# Altium PCB PCB.pcbdoc
Units mm, origin at the board's own origin, x right, y up, seen from the top; angles counter-clockwise.
Board outline 51 x 100 mm, 4 copper layers (Top Layer, GND, POWER, Bottom Layer), stack 1.784 mm thick; 155 components, 108 nets, 814 pads, 0 vias.
Unrouted connection lines stored in the file: 225.
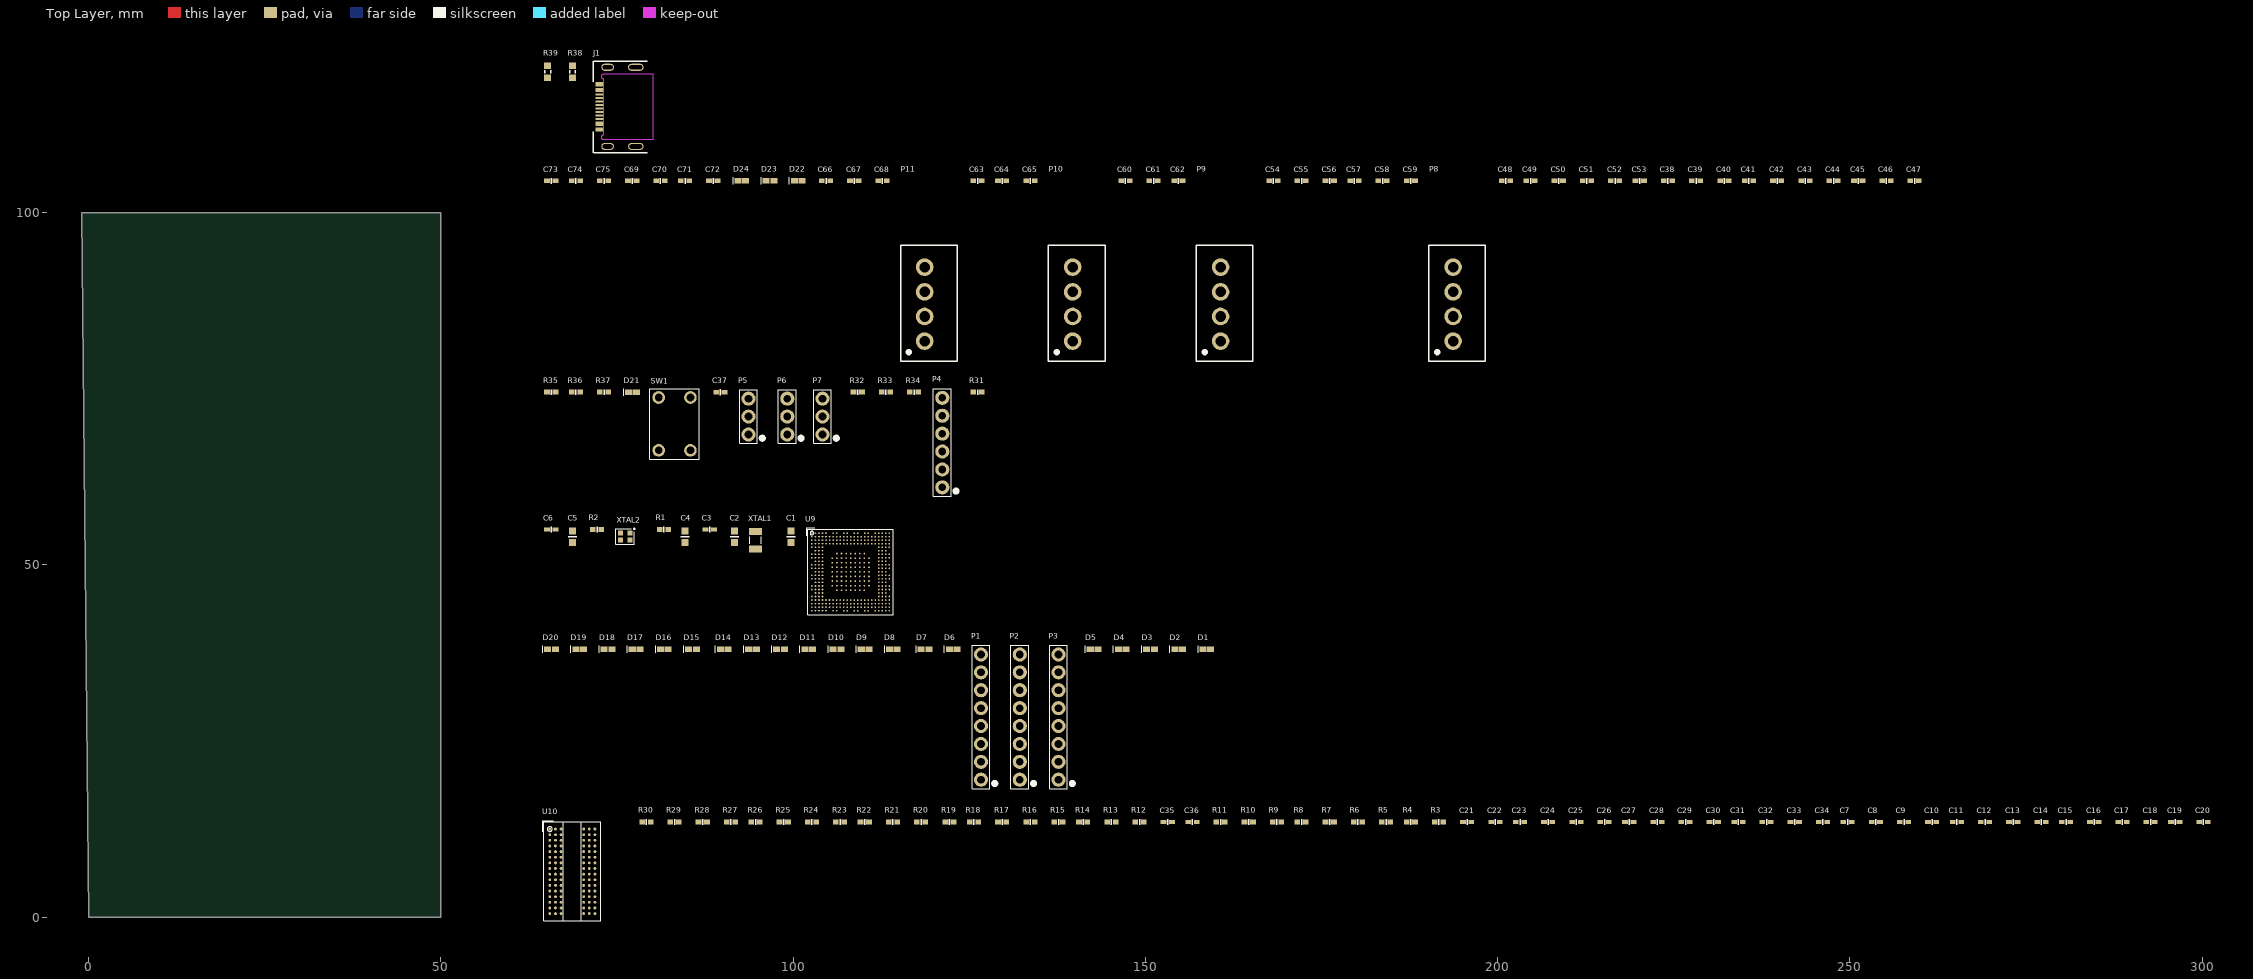
[diagram p0: Top Layer view]
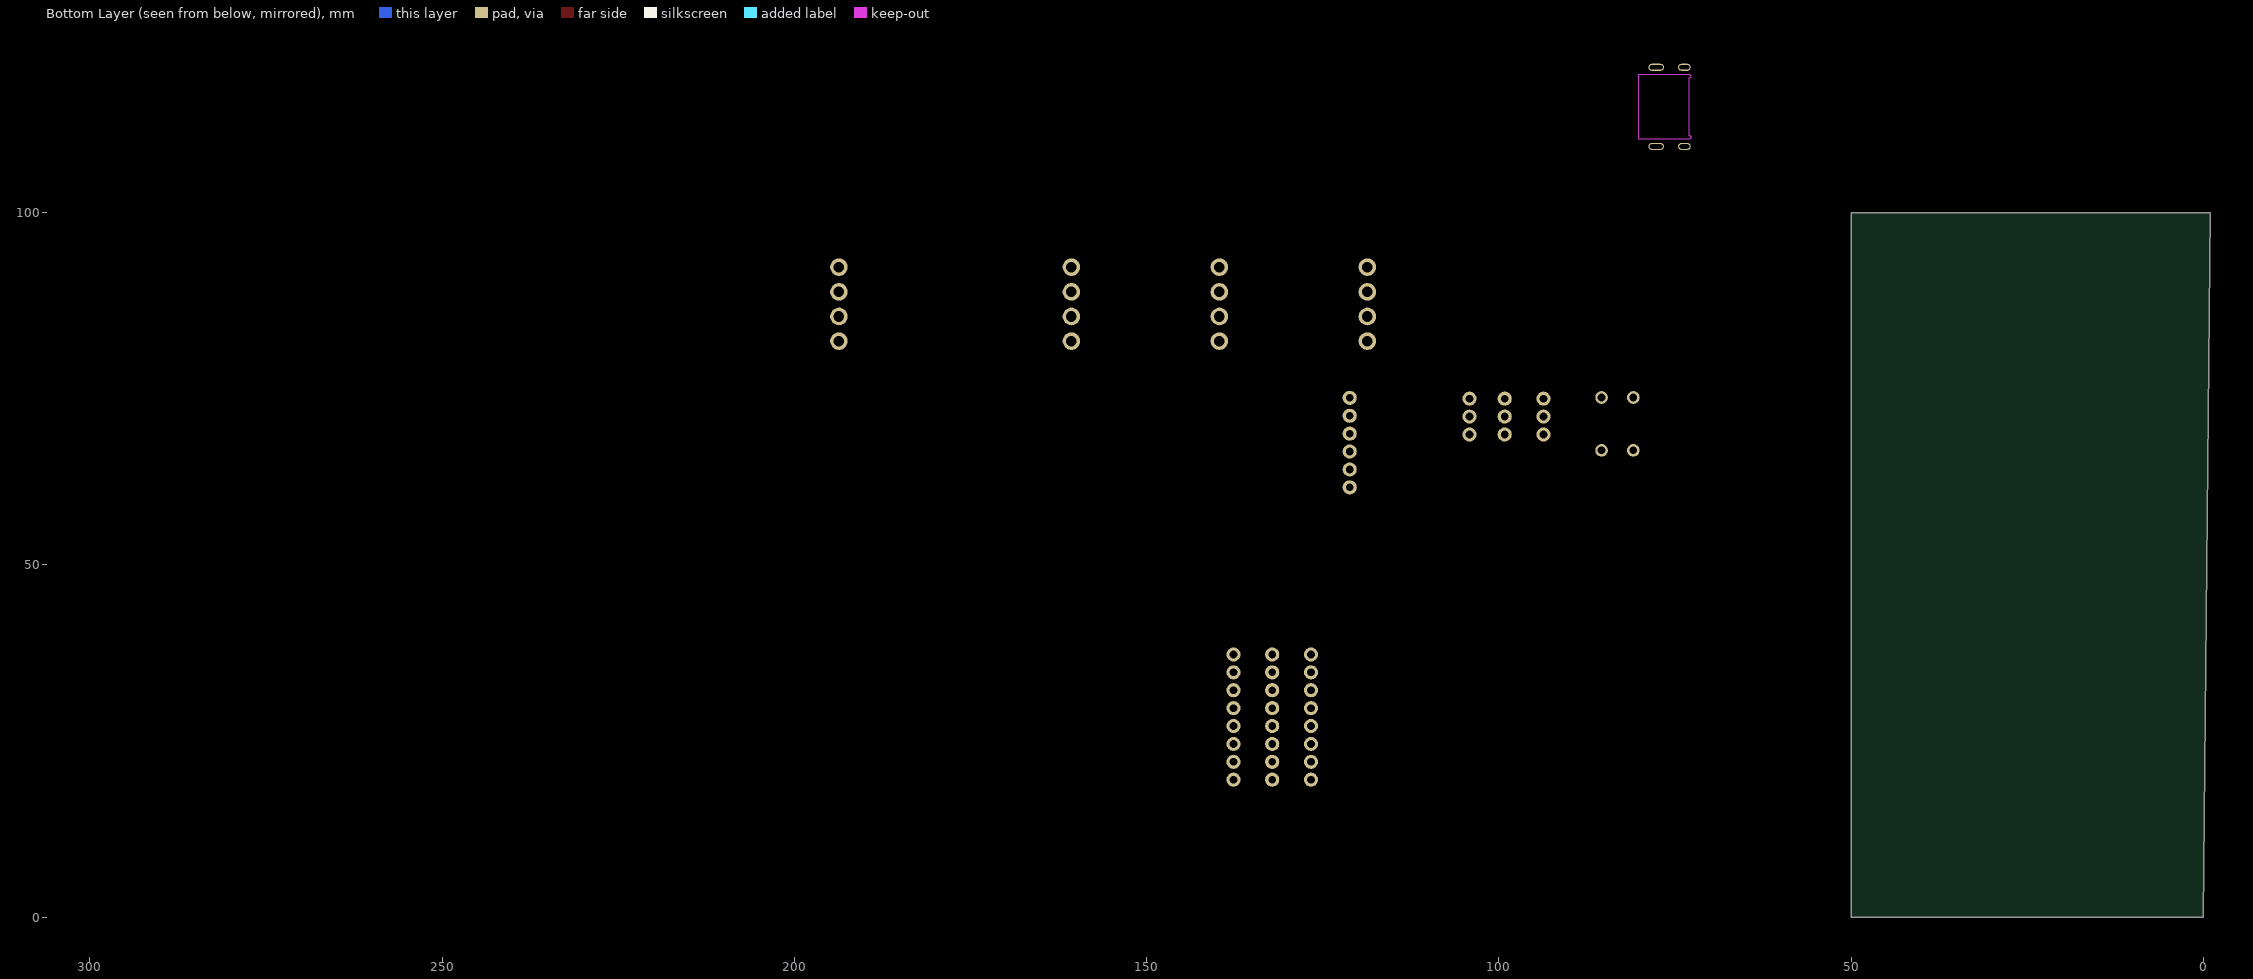
[diagram p1: Bottom Layer view, seen from below]

## Layer stack, top to bottom
Top Solder: solder mask 0.013, Solder Resist, Dk 3.4
Top Layer: signal copper 0.036
Dielectric 1: prepreg 0.0711, PP-006, Dk 4.1
GND: signal copper 0.035
Dielectric2: prepreg 1.5, FR-4, Dk 4.2
POWER: signal copper 0.035
Dielectric 2: prepreg 0.0711, PP-006, Dk 4.1
Bottom Layer: signal copper 0.036
Bottom Solder: solder mask 0.013, Solder Resist, Dk 3.4

## Board outline
0,0 -1,100 50,100 50,0

## Design rules (kind name [scope] priority, off if disabled: settings)
BoardOutlineClearance GND [OnLayer('GND')] p1: gap=0.762 ignorepadtopadclearanceinfootprint=FALSE
BoardOutlineClearance TOP [(OnLayer('Top Layer'))] p2: gap=0.635 ignorepadtopadclearanceinfootprint=FALSE
BoardOutlineClearance BOTTOM [(InComponent('J1') AND OnLayer('3D'))] p3: gap=0.762 ignorepadtopadclearanceinfootprint=FALSE
BoardOutlineClearance POWER [OnLayer('POWER')] p4: gap=1.016 ignorepadtopadclearanceinfootprint=FALSE
Clearance Clearance_12V [(InNet('P12V') OR InNet('NetD5_1') OR InNet('NetD9_1'))] p1: gap=0.254 ignorepadtopadclearanceinfootprint=TRUE
Clearance Clearance_1 [All] p2: gap=0.102 ignorepadtopadclearanceinfootprint=TRUE
ComponentClearance [All] p1: gap=0.254 collisioncheckmode=3 verticalgap=0 showdistances=FALSE
DiffPairsRouting [All] p1: maxlimit=0.254 minlimit=0.254 mostfreqgap=0.254 toplayer_minwidth=0.381 toplayer_maxwidth=0.381 toplayer_prefwidth=0.381 midlayer1_minwidth=0.381 midlayer1_maxwidth=0.381 midlayer1_prefwidth=0.381 midlayer2_minwidth=0.381 midlayer2_maxwidth=0.381 midlayer2_prefwidth=0.381 bottomlayer_minwidth=0.381 bottomlayer_maxwidth=0.381 bottomlayer_prefwidth=0.381 maxuncoupledlength=12.7
HoleSize [All] p1: absolutevalues=TRUE maxlimit=5 minlimit=0.025 maxpercent=80.000 minpercent=20.000
MinimumSolderMaskSliver [All] p1: minsoldermaskwidth=0
PolygonConnect PolygonConnect_1 [(InComponent('U8')) or (InComponent('U6'))] p1: connectstyle=Direct reliefconductorwidth=0.254 reliefentries=4 polygonreliefangle="90 Angle" airgapwidth=0.254
PolygonConnect [All] p2: thpad.connectstyle=Relief thpad.reliefconductorwidth=0.508 thpad.reliefentries=4 thpad.polygonreliefangle="90 Angle" thpad.airgapwidth=0.254 smdpad.connectstyle=Relief smdpad.reliefconductorwidth=0.508 smdpad.reliefentries=4 smdpad.polygonreliefangle="90 Angle" smdpad.airgapwidth=0.254 via.connectstyle=Direct via.reliefconductorwidth=0.254 via.reliefentries=4 via.polygonreliefangle="90 Angle" via.airgapwidth=0.254
RoomDefinition U_MPU [InComponentClass('U_MPU')] p1: confinementstyle=ConfineIn formatcopy=TRUE lockcomponents=FALSE outline 64.17,42.025 115.17,42.025 115.17,57.525 64.17,57.525
RoomDefinition U_USB [InComponentClass('U_USB')] p2: confinementstyle=ConfineIn formatcopy=TRUE lockcomponents=FALSE outline 64.17,108.025 80.67,108.025 80.67,123.525 64.17,123.525
RoomDefinition U_Power [InComponentClass('U_Power')] p3: confinementstyle=ConfineIn formatcopy=TRUE lockcomponents=FALSE outline 64.17,78.525 260.669,78.525 260.669,107.025 64.17,107.025
RoomDefinition U_Peripherals [InComponentClass('U_Peripherals')] p4: confinementstyle=ConfineIn formatcopy=TRUE lockcomponents=FALSE outline 64.17,59.025 127.67,59.025 127.67,77.525 64.17,77.525
RoomDefinition U_GPIO_Breakout [InComponentClass('U_GPIO_Breakout')] p5: confinementstyle=ConfineIn formatcopy=TRUE lockcomponents=FALSE outline 64.17,17.525 160.67,17.525 160.67,41.025 64.17,41.025
RoomDefinition U_DDR3L [InComponentClass('U_DDR3L')] p6: confinementstyle=ConfineIn formatcopy=TRUE lockcomponents=FALSE outline 63.67,-0.975 301.669,-0.975 301.669,16.025 63.67,16.025
RoutingVias [All] p1: holewidth=0.3 width=0.55 viastyle="Through Hole" minholewidth=0.2 minwidth=0.4 maxholewidth=0.3 maxwidth=0.55
SilkToSilkClearance [All] p1: silktosilkclearance=0
SilkToSolderMaskClearance SilkscreenOverComponentPads [IsPad] p1: minsilkscreentomaskgap=0 clearancetoexposedcopper=TRUE
SolderMaskExpansion Vias [IsVia] p1: expansion=0.102 istentingtop=TRUE
SolderMaskExpansion [All] p2: expansion=0.102 istentingtop=FALSE
UnRoutedNet [All] p1: checkbadconnections=TRUE
Width [All] p1: maxlimit=2.54 minlimit=0.102 preferedwidth=0.254 toplayer_prefwidth=0.152 midlayer1_minwidth=0.254 midlayer1_maxwidth=0.254 midlayer2_minwidth=0.254 midlayer2_maxwidth=0.254 bottomlayer_prefwidth=0.152 minimp=50.000000 maximp=50.000000 favimp=50.000000
23 further rules are at their usual default settings.

## Classes and differential pairs
component class U_USB: J1 R38 R39
component class U_Power: C38 C39 C40 C41 C42 C43 C44 C45 C46 C47 C48 C49 C50 C51 C52 C53 C54 C55 C56 C57 C58 C59 C60 C61 C62 C63 C64 C65 C66 C67 C68 C69 C70 C71 C72 C73 C74 C75 D22 D23 D24 P8 P9 P10 P11
component class U_GPIO_Breakout: D1 D2 D3 D4 D5 D6 D7 D8 D9 D10 D11 D12 D13 D14 D15 D16 D17 D18 D19 D20 P1 P2 P3
component class U_MPU: C1 C2 C3 C4 C5 C6 R1 R2 U9 XTAL1 XTAL2
component class U_Peripherals: C37 D21 P4 P5 P6 P7 R31 R32 R33 R34 R35 R36 R37 SW1
component class U_DDR3L: C7 C8 C9 C10 C11 C12 C13 C14 C15 C16 C17 C18 C19 C20 C21 C22 C23 C24 C25 C26 C27 C28 C29 C30 C31 C32 C33 C34 C35 C36 R3 R4 R5 R6 R7 R8 R9 R10 R11 R12 R13 R14 R15 R16 R17 R18 R19 R20 R21 R22 R23 R24 R25 R26 R27 R28 R29 R30 U10
differential pair USB1: +USB1_P -USB1_N
differential pair DDR_DQS1: +DDR_DQS1_P -DDR_DQS1_N
differential pair DDR_DQS0: +DDR_DQS0_P -DDR_DQS0_N
differential pair DDR_CLK: +DDR_CLK_P -DDR_CLK_N

## Components (designator, comment, footprint, x,y, rotation, side; value= is the part's Value field where it differs from the comment)
C1 "12pF" CAPC0603X90N 99.67,54.025 r90 top
C2 "12pF" CAPC0603X90N 91.67,54.025 r90 top
C3 "100nF" CAPC0402X60N 88.17,55.025 r0 top
C4 "7pF" CAPC0603X90N 84.67,54.025 r90 top
C5 "7pF" CAPC0603X90N 68.67,54.025 r90 top
C6 "100nF" CAPC0402X60N 65.67,55.025 r0 top
C7 "10uF" CAPC0402X60N 249.669,13.525 r0 top
C8 "10uF" CAPC0402X60N 253.669,13.525 r0 top
C9 "100nF" CAPC0402X60N 257.669,13.525 r0 top
C10 "100nF" CAPC0402X60N 261.669,13.525 r0 top
C11 "100nF" CAPC0402X60N 265.169,13.525 r0 top
C12 "100nF" CAPC0402X60N 269.169,13.525 r0 top
C13 "100nF" CAPC0402X60N 273.169,13.525 r0 top
C14 "100nF" CAPC0402X60N 277.169,13.525 r0 top
C15 "100nF" CAPC0402X60N 280.669,13.525 r0 top
C16 "100nF" CAPC0402X60N 284.669,13.525 r0 top
C17 "100nF" CAPC0402X60N 288.669,13.525 r0 top
C18 "100nF" CAPC0402X60N 292.669,13.525 r0 top
C19 "100nF" CAPC0402X60N 296.169,13.525 r0 top
C20 "100nF" CAPC0402X60N 300.169,13.525 r0 top
C21 "10uF" CAPC0402X60N 195.67,13.525 r0 top
C22 "10uF" CAPC0402X60N 199.67,13.525 r0 top
C23 "100nF" CAPC0402X60N 203.17,13.525 r0 top
C24 "100nF" CAPC0402X60N 207.17,13.525 r0 top
C25 "100nF" CAPC0402X60N 211.17,13.525 r0 top
C26 "100nF" CAPC0402X60N 215.17,13.525 r0 top
C27 "100nF" CAPC0402X60N 218.67,13.525 r0 top
C28 "100nF" CAPC0402X60N 222.67,13.525 r0 top
C29 "100nF" CAPC0402X60N 226.669,13.525 r0 top
C30 "100nF" CAPC0402X60N 230.669,13.525 r0 top
C31 "100nF" CAPC0402X60N 234.169,13.525 r0 top
C32 "100nF" CAPC0402X60N 238.169,13.525 r0 top
C33 "100nF" CAPC0402X60N 242.169,13.525 r0 top
C34 "100nF" CAPC0402X60N 246.169,13.525 r0 top
C35 "100nF" CAPC0402X60N 153.17,13.525 r0 top
C36 "100nF" CAPC0402X60N 156.67,13.525 r0 top
C37 "100nF" CAPC0402X60N 89.67,74.525 r0 top
C38 "1uF" CAPC0402X60N 224.17,104.525 r0 top
C39 "1uF" CAPC0402X60N 228.169,104.525 r0 top
C40 "1uF" CAPC0402X60N 232.169,104.525 r0 top
C41 "1uF" CAPC0402X60N 235.669,104.525 r0 top
C42 "1uF" CAPC0402X60N 239.669,104.525 r0 top
C43 "100nF" CAPC0402X60N 243.669,104.525 r0 top
C44 "100nF" CAPC0402X60N 247.669,104.525 r0 top
C45 "100nF" CAPC0402X60N 251.169,104.525 r0 top
C46 "100nF" CAPC0402X60N 255.169,104.525 r0 top
C47 "100nF" CAPC0402X60N 259.169,104.525 r0 top
C48 "1uF" CAPC0402X60N 201.17,104.525 r0 top
C49 "1uF" CAPC0402X60N 204.67,104.525 r0 top
C50 "1uF" CAPC0402X60N 208.67,104.525 r0 top
C51 "100nF" CAPC0402X60N 212.67,104.525 r0 top
C52 "100nF" CAPC0402X60N 216.67,104.525 r0 top
C53 "100nF" CAPC0402X60N 220.17,104.525 r0 top
C54 "1uF" CAPC0402X60N 168.17,104.525 r0 top
C55 "1uF" CAPC0402X60N 172.17,104.525 r0 top
C56 "1uF" CAPC0402X60N 176.17,104.525 r0 top
C57 "100nF" CAPC0402X60N 179.67,104.525 r0 top
C58 "100nF" CAPC0402X60N 183.67,104.525 r0 top
C59 "100nF" CAPC0402X60N 187.67,104.525 r0 top
C60 "1uF" CAPC0402X60N 147.17,104.525 r0 top
C61 "100nF" CAPC0402X60N 151.17,104.525 r0 top
C62 "100nF" CAPC0402X60N 154.67,104.525 r0 top
C63 "1uF" CAPC0402X60N 126.17,104.525 r0 top
C64 "100nF" CAPC0402X60N 129.67,104.525 r0 top
C65 "100nF" CAPC0402X60N 133.67,104.525 r0 top
C66 "1uF" CAPC0402X60N 104.67,104.525 r0 top
C67 "100nF" CAPC0402X60N 108.67,104.525 r0 top
C68 "100nF" CAPC0402X60N 112.67,104.525 r0 top
C69 "1uF" CAPC0402X60N 77.17,104.525 r0 top
C70 "1uF" CAPC0402X60N 81.17,104.525 r0 top
C71 "100nF" CAPC0402X60N 84.67,104.525 r0 top
C72 "1uF" CAPC0402X60N 88.67,104.525 r0 top
C73 "1uF" CAPC0402X60N 65.67,104.525 r0 top
C74 "100nF" CAPC0402X60N 69.17,104.525 r0 top
C75 "100nF" CAPC0402X60N 73.17,104.525 r0 top
D1 "PESD5V0U1UB.115" SOD523 158.17,38.025 r0 top
D2 "PESD5V0U1UB.115" SOD523 154.17,38.025 r0 top
D3 "PESD5V0U1UB.115" SOD523 150.17,38.025 r0 top
D4 "PESD5V0U1UB.115" SOD523 146.17,38.025 r0 top
D5 "PESD5V0U1UB.115" SOD523 142.17,38.025 r0 top
D6 "PESD5V0U1UB.115" SOD523 122.17,38.025 r0 top
D7 "PESD5V0U1UB.115" SOD523 118.17,38.025 r0 top
D8 "PESD5V0U1UB.115" SOD523 113.67,38.025 r0 top
D9 "PESD5V0U1UB.115" SOD523 109.67,38.025 r0 top
D10 "PESD5V0U1UB.115" SOD523 105.67,38.025 r0 top
D11 "PESD5V0U1UB.115" SOD523 101.67,38.025 r0 top
D12 "PESD5V0U1UB.115" SOD523 97.67,38.025 r0 top
D13 "PESD5V0U1UB.115" SOD523 93.67,38.025 r0 top
D14 "PESD5V0U1UB.115" SOD523 89.67,38.025 r0 top
D15 "PESD5V0U1UB.115" SOD523 85.17,38.025 r0 top
D16 "PESD5V0U1UB.115" SOD523 81.17,38.025 r0 top
D17 "PESD5V0U1UB.115" SOD523 77.17,38.025 r0 top
D18 "PESD5V0U1UB.115" SOD523 73.17,38.025 r0 top
D19 "PESD5V0U1UB.115" SOD523 69.17,38.025 r0 top
D20 "PESD5V0U1UB.115" SOD523 65.17,38.025 r0 top
D21 "PESD5V0U1UB.115" SOD523 76.67,74.525 r0 top
D22 "PESD5V0U1UB.115" SOD523 100.17,104.525 r0 top
D23 "PESD5V0U1UB.115" SOD523 96.17,104.525 r0 top
D24 "PESD5V0U1UB.115" SOD523 92.17,104.525 r0 top
J1 "USB-C Power" USB_C_POWER 75.67,115.025 r90 top
P1 "DS1021-1*8SF1-1" HDR_8X1V_M_2P54MM 126.67,19.525 r90 top
P2 "DS1021-1*8SF1-1" HDR_8X1V_M_2P54MM 132.17,19.525 r90 top
P3 "DS1021-1*8SF1-1" HDR_8X1V_M_2P54MM 137.67,19.525 r90 top
P4 "DS1021-1*8SF1-1" HDR_6X1V_M_2P54MM 121.17,61.025 r90 top
P5 "77311-818-03LF" HDR_3X1V_M_2P54MM 93.67,68.525 r90 top
P6 "77311-818-03LF" HDR_3X1V_M_2P54MM 99.17,68.525 r90 top
P7 "77311-818-03LF" HDR_3X1V_M_2P54MM 104.17,68.525 r90 top
P8 "15EDGVC-3.5-04P-14-00A(H)" PLUGTERM_THT_4X1H_3P5MM_STRAIGHT 194.17,87.025 r90 top
P9 "15EDGVC-3.5-04P-14-00A(H)" PLUGTERM_THT_4X1H_3P5MM_STRAIGHT 161.17,87.025 r90 top
P10 "15EDGVC-3.5-04P-14-00A(H)" PLUGTERM_THT_4X1H_3P5MM_STRAIGHT 140.17,87.025 r90 top
P11 "15EDGVC-3.5-04P-14-00A(H)" PLUGTERM_THT_4X1H_3P5MM_STRAIGHT 119.17,87.025 r90 top
R1 "3k" RESC0402X40N 81.67,55.025 r0 top
R2 "240R" RESC0402X40N 72.17,55.025 r0 top
R3 "54R9" RESC0402X40N 191.67,13.525 r0 top
R4 "54R9" RESC0402X40N 187.67,13.525 r0 top
R5 "54R9" RESC0402X40N 184.17,13.525 r0 top
R6 "54R9" RESC0402X40N 180.17,13.525 r0 top
R7 "54R9" RESC0402X40N 176.17,13.525 r0 top
R8 "54R9" RESC0402X40N 172.17,13.525 r0 top
R9 "54R9" RESC0402X40N 168.67,13.525 r0 top
R10 "54R9" RESC0402X40N 164.67,13.525 r0 top
R11 "54R9" RESC0402X40N 160.67,13.525 r0 top
R12 "54R9" RESC0402X40N 149.17,13.525 r0 top
R13 "54R9" RESC0402X40N 145.17,13.525 r0 top
R14 "54R9" RESC0402X40N 141.17,13.525 r0 top
R15 "54R9" RESC0402X40N 137.67,13.525 r0 top
R16 "54R9" RESC0402X40N 133.67,13.525 r0 top
R17 "54R9" RESC0402X40N 129.67,13.525 r0 top
R18 "100R" RESC0402X40N 125.67,13.525 r0 top
R19 "54R9" RESC0402X40N 122.17,13.525 r0 top
R20 "54R9" RESC0402X40N 118.17,13.525 r0 top
R21 "10k" RESC0402X40N 114.17,13.525 r0 top
R22 "54R9" RESC0402X40N 110.17,13.525 r0 top
R23 "54R9" RESC0402X40N 106.67,13.525 r0 top
R24 "10k" RESC0402X40N 102.67,13.525 r0 top
R25 "54R9" RESC0402X40N 98.67,13.525 r0 top
R26 "54R9" RESC0402X40N 94.67,13.525 r0 top
R27 "54R9" RESC0402X40N 91.17,13.525 r0 top
R28 "54R9" RESC0402X40N 87.17,13.525 r0 top
R29 "54R9" RESC0402X40N 83.17,13.525 r0 top
R30 "240R" RESC0402X40N 79.17,13.525 r0 top
R31 "100k" RESC0402X40N 126.17,74.525 r0 top
R32 "100k" RESC0402X40N 109.17,74.525 r0 top
R33 "100k" RESC0402X40N 113.17,74.525 r0 top
R34 "100k" RESC0402X40N 117.17,74.525 r0 top
R35 "100k" RESC0402X40N 65.67,74.525 r0 top
R36 "100k" RESC0402X40N 69.17,74.525 r0 top
R37 "100k" RESC0402X40N 73.17,74.525 r0 top
R38 "5.1k" RESC0603X60N 68.67,120.025 r90 top
R39 "5.1k" RESC0603X60N 65.17,120.025 r90 top
SW1 "1825967-2" "SPST-NO TACT" 83.17,70.025 r90 top
U9 "STM32MP157CAC3" TFBGA361_12X12 108.17,49.025 r0 top
U10 "MT41K256M16TW-107:P" BGA96_8X14 68.67,6.525 r0 top
XTAL1 "32.768 kHz" FC-135 94.67,53.525 r90 top
XTAL2 "32 MHz" HCR2016 76.17,54.025 r0 top

## Footprints (in the part's own frame and the unit in brackets; to place one, negate y for a bottom-side part, rotate by r counter-clockwise, add the part's x,y. Pads: shape width x height; smd on the part's side, far side on the other; paste and mask are expansions set on the pad)
BGA96_8X14 [mm] "96-balls, Body 8mm x 14mm, 0.8mm pitch"
  round 0.4 smd mask+0.05: A1(-3.2,6) A2(-2.4,6) A3(-1.6,6) A7(1.6,6) A8(2.4,6) A9(3.2,6) B1(-3.2,5.2) B2(-2.4,5.2) B3(-1.6,5.2) B7(1.6,5.2) B8(2.4,5.2) B9(3.2,5.2) C1(-3.2,4.4) C2(-2.4,4.4) C3(-1.6,4.4) C7(1.6,4.4) C8(2.4,4.4) C9(3.2,4.4) D1(-3.2,3.6) D2(-2.4,3.6) D3(-1.6,3.6) D7(1.6,3.6) D8(2.4,3.6) D9(3.2,3.6) E1(-3.2,2.8) E2(-2.4,2.8) E3(-1.6,2.8) E7(1.6,2.8) E8(2.4,2.8) E9(3.2,2.8) F1(-3.2,2) F2(-2.4,2) F3(-1.6,2) F7(1.6,2) F8(2.4,2) F9(3.2,2) G1(-3.2,1.2) G2(-2.4,1.2) G3(-1.6,1.2) G7(1.6,1.2) G8(2.4,1.2) G9(3.2,1.2) H1(-3.2,0.4) H2(-2.4,0.4) H3(-1.6,0.4) H7(1.6,0.4) H8(2.4,0.4) H9(3.2,0.4) J1(-3.2,-0.4) J2(-2.4,-0.4) J3(-1.6,-0.4) J7(1.6,-0.4) J8(2.4,-0.4) J9(3.2,-0.4) K1(-3.2,-1.2) K2(-2.4,-1.2) K3(-1.6,-1.2) K7(1.6,-1.2) K8(2.4,-1.2) K9(3.2,-1.2) L1(-3.2,-2) L2(-2.4,-2) L3(-1.6,-2) L7(1.6,-2) L8(2.4,-2) L9(3.2,-2) M1(-3.2,-2.8) M2(-2.4,-2.8) M3(-1.6,-2.8) M7(1.6,-2.8) M8(2.4,-2.8) M9(3.2,-2.8) N1(-3.2,-3.6) N2(-2.4,-3.6) N3(-1.6,-3.6) N7(1.6,-3.6) N8(2.4,-3.6) N9(3.2,-3.6) P1(-3.2,-4.4) P2(-2.4,-4.4) P3(-1.6,-4.4) P7(1.6,-4.4) P8(2.4,-4.4) P9(3.2,-4.4) R1(-3.2,-5.2) R2(-2.4,-5.2) R3(-1.6,-5.2) R7(1.6,-5.2) R8(2.4,-5.2) R9(3.2,-5.2) T1(-3.2,-6) T2(-2.4,-6) T3(-1.6,-6) T7(1.6,-6) T8(2.4,-6) T9(3.2,-6)
  silkscreen extent -4.2,-7.05 4.05,7.2, body extent -4.05,-7.05 4.05,7.05, height 1.2
CAPC0402X60N [mm] "Chip Capacitor, Body 1.0x0.5mm, IPC Medium Density"
  rect 0.8x0.6 smd: 1(-0.6,0) 2(0.6,0)
  silkscreen extent 0,-0.4 0,0.4, body extent -0.5,-0.25 0.5,0.25, height 0.6
CAPC0603X90N [mm] "Chip Capacitor, Body 1.6x0.8mm, IPC Medium Density"
  rect 1x1 smd: 1(-0.8,0) 2(0.8,0)
  silkscreen extent 0,-0.6 0,0.6, body extent -0.8,-0.4 0.8,0.4, height 0.9
FC-135 [mm] "FC-135R/FC-135, 2-Lead, Body 3.2x1.5mm"
  rect 1x1.8 smd: 1(1.25,0) 2(-1.25,0)
  silkscreen extent -0.5,-0.8 0.5,0.8, body extent -1.6,-0.75 1.6,0.75, height 0.8
HCR2016 [mm] "HCR, 4-Lead, Body 2x1.6mm"
  rect 0.75x0.7 smd: 1(0.675,0.5) 2(-0.675,0.5) 3(-0.675,-0.5) 4(0.675,-0.5)
  silkscreen extent -1.32,-1.1 1.35,1.15, body extent -1,-0.8 1,0.8, height 0.65
HDR_3X1V_M_2P54MM [mm] "General Purpose Header: THT, 2.54mm, Male, Straight"
  round 2 hole 1.1: 1(0,0) 2(2.54,0) 3(5.08,0)
  silkscreen extent -1.27,-2.21 6.35,1.27, body extent -1.07,-1.17 6.15,1.17, height 8.24
HDR_6X1V_M_2P54MM [mm] "General Purpose Header: THT, 2.54mm, Male, Straight"
  round 2 hole 1.1: 1(0,0) 2(2.54,0) 3(5.08,0) 4(7.62,0) 5(10.16,0) 6(12.7,0)
  silkscreen extent -1.27,-2.21 13.97,1.27, body extent -1.27,-1.27 13.97,1.27, height 9.2
HDR_8X1V_M_2P54MM [mm] "General Purpose Header: THT, 2.54mm, Male, Straight"
  round 2 hole 1.1: 1(0,0) 2(2.54,0) 3(5.08,0) 4(7.62,0) 5(10.16,0) 6(12.7,0) 7(15.24,0) 8(17.78,0)
  silkscreen extent -1.27,-2.21 19.05,1.27, body extent -1.27,-1.27 19.05,1.27, height 8.57
PLUGTERM_THT_4X1H_3P5MM_STRAIGHT [mm] "Pluggable Terminal Block, 4 Positions, Straight, THT, 14.8x7mm body"
  round 2.5 hole 1.5: 1(-5.25,0.5) 2(-1.75,0.5) 3(1.75,0.5) 4(5.25,0.5)
  silkscreen extent -8.13,-4.1 8.32,3.93, body extent -7.67,-3.75 7.72,3.5, height 9.2
RESC0402X40N [mm] "Chip Resistor, Body 1.1x0.5mm, IPC Medium Density"
  rect 0.8x0.7 smd: 1(-0.6,0) 2(0.6,0)
  silkscreen extent 0,-0.38 0,0.38, body extent -0.5,-0.25 0.5,0.25, height 0.35
RESC0603X60N [mm] "Chip Resistor, Body 1.6x0.8mm, IPC Medium Density"
  rect 0.9x1 smd: 1(-0.85,0) 2(0.85,0)
  silkscreen extent -0.2,-0.4 0.2,0.4, body extent -0.77,-0.42 0.78,0.43, height 0.45
SOD523 [mm] "SOD523, 2 Leads, Pitch 1.1mm, Body 0.85x1.25mm"
  rect 1x0.8 smd: 1(0,0) 2(1.1,0)
  silkscreen extent -0.7,-0.5 -0.7,0.5, body extent -0.38,-0.45 1.33,0.45, height 0.7
"SPST-NO TACT" [mm]
  round 1.8 hole 1.1: 1(-3.75,2.25) 2(3.75,2.25) 3(-3.75,-2.25) 4(3.75,-2.25)
  silkscreen extent -5,-3.5 5,3.5, body extent -3.9,-3 3.9,3, height 7.5
TFBGA361_12X12 [mm] "TFBGA361, Body 12x12mm, 361 balls pitch 0.5 mm"
  round 0.23 smd mask+0.05: 1A2(-1.95,2.6) 1A3(-1.3,2.6) 1A4(-0.65,2.6) 1A5(0,2.6) 1A6(0.65,2.6) 1A7(1.3,2.6) 1A8(1.95,2.6) 1B1(-2.6,1.95) 1B2(-1.95,1.95) 1B3(-1.3,1.95) 1B4(-0.65,1.95) 1B5(0,1.95) 1B6(0.65,1.95) 1B7(1.3,1.95) 1B8(1.95,1.95) 1B9(2.6,1.95) 1C1(-2.6,1.3) 1C2(-1.95,1.3) 1C3(-1.3,1.3) 1C4(-0.65,1.3) 1C5(0,1.3) 1C6(0.65,1.3) 1C7(1.3,1.3) 1C8(1.95,1.3) 1C9(2.6,1.3) 1D1(-2.6,0.65) 1D2(-1.95,0.65) 1D3(-1.3,0.65) 1D4(-0.65,0.65) 1D5(0,0.65) 1D6(0.65,0.65) 1D7(1.3,0.65) 1D8(1.95,0.65) 1D9(2.6,0.65) 1E1(-2.6,0) 1E2(-1.95,0) 1E3(-1.3,0) 1E4(-0.65,0) 1E5(0,0) 1E6(0.65,0) 1E7(1.3,0) 1E8(1.95,0) 1E9(2.6,0) 1F1(-2.6,-0.65) 1F2(-1.95,-0.65) 1F3(-1.3,-0.65) 1F4(-0.65,-0.65) 1F5(0,-0.65) 1F6(0.65,-0.65) 1F7(1.3,-0.65) 1F8(1.95,-0.65) 1F9(2.6,-0.65) 1G1(-2.6,-1.3) 1G2(-1.95,-1.3) 1G3(-1.3,-1.3) 1G4(-0.65,-1.3) 1G5(0,-1.3) 1G6(0.65,-1.3) 1G7(1.3,-1.3) 1G8(1.95,-1.3) 1G9(2.6,-1.3) 1H1(-2.6,-1.95) 1H2(-1.95,-1.95) 1H3(-1.3,-1.95) 1H4(-0.65,-1.95) 1H5(0,-1.95) 1H6(0.65,-1.95) 1H7(1.3,-1.95) 1H8(1.95,-1.95) 1H9(2.6,-1.95) 1J2(-1.95,-2.6) 1J3(-1.3,-2.6) 1J4(-0.65,-2.6) 1J5(0,-2.6) 1J6(0.65,-2.6) 1J7(1.3,-2.6) 1J8(1.95,-2.6) A1(-5.5,5.5) A2(-5,5.5) A3(-4.5,5.5) A4(-4,5.5) A5(-3.5,5.5) A7(-2.5,5.5) A8(-2,5.5) A10(-1,5.5) A11(-0.5,5.5) A13(0.5,5.5) A14(1,5.5) A16(2,5.5) A17(2.5,5.5) A19(3.5,5.5) A20(4,5.5) A21(4.5,5.5) A22(5,5.5) A23(5.5,5.5) AA1(-5.5,-4.5) AA2(-5,-4.5) AA3(-4.5,-4.5) AA4(-4,-4.5) AA5(-3.5,-4.5) AA6(-3,-4.5) AA7(-2.5,-4.5) AA8(-2,-4.5) AA9(-1.5,-4.5) AA10(-1,-4.5) AA11(-0.5,-4.5) AA12(0,-4.5) AA13(0.5,-4.5) AA14(1,-4.5) AA15(1.5,-4.5) AA16(2,-4.5) AA17(2.5,-4.5) AA18(3,-4.5) AA19(3.5,-4.5) AA20(4,-4.5) AA21(4.5,-4.5) AA22(5,-4.5) AA23(5.5,-4.5) AB1(-5.5,-5) AB2(-5,-5) AB3(-4.5,-5) AB4(-4,-5) AB5(-3.5,-5) AB6(-3,-5) AB7(-2.5,-5) AB8(-2,-5) AB9(-1.5,-5) AB10(-1,-5) AB11(-0.5,-5) AB12(0,-5) AB13(0.5,-5) AB14(1,-5) AB15(1.5,-5) AB16(2,-5) AB17(2.5,-5) AB18(3,-5) AB19(3.5,-5) AB20(4,-5) AB21(4.5,-5) AB22(5,-5) AB23(5.5,-5) AC1(-5.5,-5.5) AC2(-5,-5.5) AC3(-4.5,-5.5) AC4(-4,-5.5) AC5(-3.5,-5.5) AC7(-2.5,-5.5) AC8(-2,-5.5) AC10(-1,-5.5) AC11(-0.5,-5.5) AC13(0.5,-5.5) AC14(1,-5.5) AC16(2,-5.5) AC17(2.5,-5.5) AC19(3.5,-5.5) AC20(4,-5.5) AC21(4.5,-5.5) AC22(5,-5.5) AC23(5.5,-5.5) B1(-5.5,5) B2(-5,5) B3(-4.5,5) B4(-4,5) B5(-3.5,5) B6(-3,5) B7(-2.5,5) B8(-2,5) B9(-1.5,5) B10(-1,5) B11(-0.5,5) B12(0,5) B13(0.5,5) B14(1,5) B15(1.5,5) B16(2,5) B17(2.5,5) B18(3,5) B19(3.5,5) B20(4,5) B21(4.5,5) B22(5,5) B23(5.5,5) C1(-5.5,4.5) C2(-5,4.5) C3(-4.5,4.5) C4(-4,4.5) C5(-3.5,4.5) C6(-3,4.5) C7(-2.5,4.5) C8(-2,4.5) C9(-1.5,4.5) C10(-1,4.5) C11(-0.5,4.5) C12(0,4.5) C13(0.5,4.5) C14(1,4.5) C15(1.5,4.5) C16(2,4.5) C17(2.5,4.5) C18(3,4.5) C19(3.5,4.5) C20(4,4.5) C21(4.5,4.5) C22(5,4.5) C23(5.5,4.5) D1(-5.5,4) D2(-5,4) D3(-4.5,4) D4(-4,4) D5(-3.5,4) D6(-3,4) D7(-2.5,4) D8(-2,4) D9(-1.5,4) D10(-1,4) D11(-0.5,4) D12(0,4) D13(0.5,4) D14(1,4) D15(1.5,4) D16(2,4) D17(2.5,4) D18(3,4) D19(3.5,4) D20(4,4) D21(4.5,4) D22(5,4) D23(5.5,4) E1(-5.5,3.5) E2(-5,3.5) E3(-4.5,3.5) E4(-4,3.5) E20(4,3.5) E21(4.5,3.5) E22(5,3.5) E23(5.5,3.5) F2(-5,3) F3(-4.5,3) F4(-4,3) F20(4,3) F21(4.5,3) F22(5,3) G1(-5.5,2.5) G2(-5,2.5) G3(-4.5,2.5) G4(-4,2.5) G20(4,2.5) G21(4.5,2.5) G22(5,2.5) G23(5.5,2.5) H1(-5.5,2) H2(-5,2) H3(-4.5,2) H4(-4,2) H20(4,2) H21(4.5,2) H22(5,2) H23(5.5,2) J2(-5,1.5) J3(-4.5,1.5) J4(-4,1.5) J20(4,1.5) J21(4.5,1.5) J22(5,1.5) K1(-5.5,1) K2(-5,1) K3(-4.5,1) K4(-4,1) K20(4,1) K21(4.5,1) K22(5,1) K23(5.5,1) L1(-5.5,0.5) L2(-5,0.5) L3(-4.5,0.5) L4(-4,0.5) L20(4,0.5) L21(4.5,0.5) L22(5,0.5) L23(5.5,0.5) M2(-5,0) M3(-4.5,0) M4(-4,0) M20(4,0) M21(4.5,0) M22(5,0) N1(-5.5,-0.5) N2(-5,-0.5) N3(-4.5,-0.5) N4(-4,-0.5) N20(4,-0.5) N21(4.5,-0.5) N22(5,-0.5) N23(5.5,-0.5) P1(-5.5,-1) P2(-5,-1) P3(-4.5,-1) P4(-4,-1) P20(4,-1) P21(4.5,-1) P22(5,-1) P23(5.5,-1) R2(-5,-1.5) R3(-4.5,-1.5) R4(-4,-1.5) R20(4,-1.5) R21(4.5,-1.5) R22(5,-1.5) T1(-5.5,-2) T2(-5,-2) T3(-4.5,-2) T4(-4,-2) T20(4,-2) T21(4.5,-2) T22(5,-2) T23(5.5,-2) U1(-5.5,-2.5) U2(-5,-2.5) U3(-4.5,-2.5) U4(-4,-2.5) U20(4,-2.5) U21(4.5,-2.5) U22(5,-2.5) U23(5.5,-2.5) V2(-5,-3) V3(-4.5,-3) V4(-4,-3) V20(4,-3) V21(4.5,-3) V22(5,-3) W1(-5.5,-3.5) W2(-5,-3.5) W3(-4.5,-3.5) W4(-4,-3.5) W20(4,-3.5) W21(4.5,-3.5) W22(5,-3.5) W23(5.5,-3.5) Y1(-5.5,-4) Y2(-5,-4) Y3(-4.5,-4) Y4(-4,-4) Y5(-3.5,-4) Y6(-3,-4) Y7(-2.5,-4) Y8(-2,-4) Y9(-1.5,-4) Y10(-1,-4) Y11(-0.5,-4) Y12(0,-4) Y13(0.5,-4) Y14(1,-4) Y15(1.5,-4) Y16(2,-4) Y17(2.5,-4) Y18(3,-4) Y19(3.5,-4) Y20(4,-4) Y21(4.5,-4) Y22(5,-4) Y23(5.5,-4)
  silkscreen extent -6.25,-6.07 6.07,6.25, body extent -6.07,-6.07 6.07,6.07, height 1.21
USB_C_POWER [mm]
  rect 0.6x1.1 smd: A1_B12(-3.2,3.15) A4_B9(-2.4,3.15) A9_B4(2.4,3.15) A12_B1(3.2,3.15)
  rect 0.3x1.1 smd: A5(-1.25,3.15) A6(-0.25,3.15) A7(0.25,3.15) A8(1.25,3.15) B5(1.75,3.15) B6(0.75,3.15) B7(-0.75,3.15) B8(-1.75,3.15)
  oval 1x2.2 hole 0.6 slot 1.8 at 90 deg: SHELL(-5.62,-2) SHELL(5.62,-2)
  oval 1x1.8 hole 0.6 slot 1.4 at 90 deg: SHELL(-5.62,2) SHELL(5.62,2)
  Keep-Out Layer board cut-out: -4.62,-4.5 4.62,-4.5 4.62,2.6 4.625,2.6 4.595,2.73 4.512,2.835 4.392,2.892 4.258,2.892 4.138,2.835 4.055,2.73 4.025,2.6 4.025,2.6 -4.025,2.6 -4.055,2.73 -4.138,2.835 -4.258,2.892 -4.392,2.892 -4.512,2.835 -4.595,2.73 -4.625,2.6 -4.625,2.6 -4.62,2.6
  silkscreen extent -6.5,-3.6 6.5,4.06, body extent -5.75,-4.08 5.8,3.13, height 2.17

## Part data
C1 C2: library part CC0603_12PF_50V_5%_C0G, "Non-polarised capacitor", Supplier Part Number 1=1414612, Checked by=none, DesignItemId=CC0603_12PF_50V_5%_C0G, Height=0.8mm, HelpURL=https://api.kemet.com/component-edge/download/specsheet/C0603C120J5GACTU.pdf, Manufacturer Part Number=CC0603_12PF_50V_5%_C0G, SMD=Yes, Supplier 1=Farnell, Supplier 2=TME, Supplier 3=Mouser
C3 C6 C9 C10 C11 C12 C13 C14 C15 C16 C17 C18 C19 C20 C23 C24 C25 C26 C27 C28 C29 C30 C31 C32 C33 C34 C35 C36 C37 C43 C44 C45 C46 C47 C51 C52 C53 C57 C58 C59 C61 C62 C64 C65 C67 C68 C71 C74 C75: library part CC0402_100NF_16V_10%_X7R, "Non-polarised capacitor", Supplier Part Number 1=CL05B104KO5NNNC, Checked by=none, DesignItemId=CC0402_100NF_16V_10%_X7R, Height=0.5mm, Manufacturer Part Number=CC0402_100NF_16V_10%_X7R, SMD=Yes, Supplier 1=TME
C4 C5: library part CC0603_7PF_50V_5%_C0G, "Non-polarised capacitor", Supplier Part Number 1=1759049, Checked by=none, DesignItemId=CC0603_7PF_50V_5%_C0G, Height=0.8mm, HelpURL=http://www.farnell.com/datasheets/2860632.pdf, Manufacturer Part Number=CC0603_7PF_50V_5%_C0G, SMD=Yes, Supplier 1=Farnell, Supplier 2=TME, Supplier 3=Mouser
C7 C8 C21 C22: library part CC0402_10UF_6V3_20%_X5R, "Non-polarised capacitor", Supplier Part Number 1=GRM155R60J106ME44D, Checked by=none, DesignItemId=CC0402_10UF_6V3_20%_X5R, Height=0.5mm, HelpURL=https://www.tme.eu/Document/4a42202b32dab16128fe107dd69598cc/samsung-chip-cap.pdf, Manufacturer Part Number=CC0402_10UF_6V3_20%_X5R, SMD=Yes, Supplier 1=TME, Supplier Part Number 2=n/a, Supplier Part Number 3=n/a
C38 C39 C40 C41 C42 C48 C49 C50 C54 C55 C56 C60 C63 C66 C69 C70 C72 C73: library part CC0402_1UF_6V3_10%_X5R, "Non-polarised capacitor", Supplier Part Number 1=04026D105KAT2Aďż˝, Checked by=none, DesignItemId=CC0402_1UF_6V3_10%_X5R, Height=0.5mm, HelpURL=https://www.tme.eu/Document/73f8fd69a3c583056066ce6caf567110/AVX-X5R.pdf, Manufacturer Part Number=CC0402_1UF_6V3_10%_X5R, SMD=Yes, Supplier 1=TME, Supplier 2=Farnell, Supplier 3=Mouser, Supplier Part Number 2=n/a, Supplier Part Number 3=n/a
D1 D2 D3 D4 D5 D6 D7 D8 D9 D10 D11 D12 D13 D14 D15 D16 D17 D18 D19 D20 D21 D22 D23 D24: "Diode: TVS; 6.8V; unidirectional; SOD523; low leakage current 1nA", Manufacturer 1 Component Height=0.65mm, Checked by=none, DesignItemId=PESD5V0U1UB.115, Device=PESD5V0U1UB.115, HelpURL=https://www.tme.eu/Document/555b1b0edbea630bbc35f09868562c25/PESD5V0U1UA_UB_UL.pdf, Manufacturer Part Number=PESD5V0U1UB.115, Supplier 1=TME, Supplier 2=Mouser, Supplier Part Number 1=PESD5V0U1UB.115, Supplier Part Number 2=771-PESD5V0U1UB-T/R, Supplier Part Number 3=n/a
J1: library part "USB C Power", "USB Connectors USB C Rec 16P 3u\" Mid Mnt 1.0mm O-set SMT L = 6.5mm", Manufacturer 1 Component Height=2.8mm, Manufacturer Part Number=USB4505-03-0-A, Supplier Part Number 1=640-USB4505030A, Checked by=none, DesignItemId="USB C Power", HelpURL=https://pl.mouser.com/datasheet/2/837/usb4505-2583692.pdf, SMD=Yes, Supplier 1=Mouser, Supplier Part Number 2=n/a, Supplier Part Number 3=n/a
P1 P2 P3: library part HDR_THT_8X1V_M_2P54MM, "General Purpose Header: THT, 2.54mm, Male, Straight", Manufacturer 1 Component Height=10.92mm, Supplier Part Number 1=ZL201-08G, Checked by=none, DesignItemId=HDR_THT_8X1V_M_2P54MM, HelpURL=https://www.tme.eu/Document/cc301e58a5da78cb543a94b5a5b7f06a/DS1021.pdf, Manufacturer Part Number=DS1021-1*8SF1-1, SMD=No, Supplier 1=TME, Supplier Part Number 2=n/a, Supplier Part Number 3=n/a
P4: library part HDR_THT_6X1V_M_2P54MM, "General Purpose Header: THT, 2.54mm, Male, Straight", Manufacturer 1 Component Height=10.92mm, Supplier Part Number 1=ZL201-06G, Checked by=none, DesignItemId=HDR_THT_6X1V_M_2P54MM, HelpURL=https://www.tme.eu/Document/cc301e58a5da78cb543a94b5a5b7f06a/DS1021.pdf, Manufacturer Part Number=DS1021-1*8SF1-1, SMD=No, Supplier 1=TME, Supplier Part Number 2=n/a, Supplier Part Number 3=n/a
P5 P6 P7: library part HDR_THT_3X1V_M_2P54MM, "General Purpose Header: THT, 2.54mm, Male, Straight", Manufacturer 1 Component Height=10.92mm, Checked by=none, DesignItemId=HDR_THT_3X1V_M_2P54MM, HelpURL=https://www.tme.eu/Document/719e00d14e261a014e3a7e1c938a6b50/77311-818-XXLF.pdf, Manufacturer Part Number=77311-818-03LF, SMD=No, Supplier 1=TME, Supplier Part Number 1=77311-818-03LF, Supplier Part Number 2=n/a, Supplier Part Number 3=n/a
P8 P9 P10 P11: library part PLUGTERM_THT_4X1H_3P5MM_STRAIGHT, "Pluggable Terminal Block, 4 Positions, Straight, THT, 14.8x7mm body", Manufacturer 1 Component Height=9.2mm, Supplier Part Number 1=15EDGVC-3.5-04P, Checked by=none, DesignItemId=PLUGTERM_THT_4X1H_3P5MM_STRAIGHT, HelpURL=https://www.tme.eu/Document/83e7173fe653a2d0e44585e87978945b/opr014R8.pdf, Manufacturer Part Number=15EDGVC-3.5-04P-14-00A(H), SMD=No, Supplier 1=TME, Supplier Part Number 2=n/a, Supplier Part Number 3=n/a
R1: library part R0402_3k_0.063W_100PPM, "General Purpose Thick Film Chip Resistor", Manufacturer 1 Component Height=0.4mm, Manufacturer Part Number=0402WGF3001TCE, Tolerance=1%, Voltage=50V, Checked by=none, DesignItemId=R0402_3k_0.063W_100PPM, HelpURL=https://www.tme.eu/Document/4f50d320a6ddacb273098f84373b6259/rezystor-smd.pdf, SMD=Yes, Supplier 1=TME, Supplier Part Number 1=0402WGF3001TCE, Supplier Part Number 2=n/a, Supplier Part Number 3=n/a
R2 R30: library part R0402_240R_0.063W_100PPM, "General Purpose Thick Film Chip Resistor", Manufacturer 1 Component Height=0.4mm, Manufacturer Part Number=SMD0402-240R, Supplier Part Number 1=SMD0402-240R-1%, Tolerance=1%, Voltage=50V, Checked by=none, DesignItemId=R0402_240R_0.063W_100PPM, HelpURL=https://www.tme.eu/Document/4f50d320a6ddacb273098f84373b6259/rezystor-smd.pdf, SMD=Yes, Supplier 1=TME, Supplier Part Number 2=n/a, Supplier Part Number 3=n/a
R3 R4 R5 R6 R7 R8 R9 R10 R11 R12 R13 R14 R15 R16 R17 R19 R20 R22 R23 R25 R26 R27 R28 R29: library part R0402_54R9_0.063W_100PPM, "General Purpose Thick Film Chip Resistor", Manufacturer 1 Component Height=0.4mm, Manufacturer Part Number=RC0402FR-0754R9L, Tolerance=1%, Voltage=50V, Checked by=none, DesignItemId=R0402_54R9_0.063W_100PPM, HelpURL=https://www.tme.eu/Document/1a2bc76e2be68b3b1670068306778ce6/rc0402yageo.pdf, SMD=Yes, Supplier 1=TME, Supplier Part Number 1=RC0402FR-0754R9L, Supplier Part Number 2=n/a, Supplier Part Number 3=n/a
R18: library part R0402_100R_0.0625W_100PPM, "General Purpose Thick Film Chip Resistor", Manufacturer 1 Component Height=0.4mm, Manufacturer Part Number=CRCW0402100RFKEDC, Tolerance=1%, Voltage=50V, Checked by=none, DesignItemId=R0402_100R_0.0625W_100PPM, HelpURL=https://www.vishay.com/docs/20035/dcrcwe3.pdf, SMD=Yes
R21 R24: library part R0402_10K_0.0625W_100PPM, "General Purpose Thick Film Chip Resistor", Manufacturer 1 Component Height=0.4mm, Manufacturer Part Number=0402WGJ0103TCE, Supplier Part Number 1=SMD0402-10K, Tolerance=1%, Voltage=50V, Checked by=none, DesignItemId=R0402_10K_0.0625W_100PPM, HelpURL=https://www.tme.eu/Document/9e42ba54d36a9bd3dfa2901986ac022d/rezystor-smd.pdf, SMD=Yes, Supplier 1=TME, Supplier Part Number 2=n/a, Supplier Part Number 3=n/a
R31 R32 R33 R34 R35 R36 R37: library part R0402_100K_0.0625W_100PPM, "General Purpose Thick Film Chip Resistor", Manufacturer 1 Component Height=0.4mm, Manufacturer Part Number=CRCW0402100KFKEDC, Tolerance=1%, Voltage=50V, Checked by=none, DesignItemId=R0402_100K_0.0625W_100PPM, HelpURL=https://www.vishay.com/docs/20035/dcrcwe3.pdf, SMD=Yes
R38 R39: library part R0603_5K1_0.1W_100PPM, "General Purpose Thick Film Chip Resistor", Manufacturer 1 Component Height=0.5mm, Manufacturer Part Number=CRCW06035K10FKTABC, Tolerance=1%, Voltage=75V, Checked by=none, DesignItemId=R0603_5K1_0.1W_100PPM, SMD=Yes, Supplier 1=TME, Supplier Part Number 1=CRCW06035K10FKTABC
SW1: "SPST-NO; 0,05A/24VDC; THT; RconMax 50mOhm", Manufacturer 1 Component Height=3.6mm, Checked by=none, DesignItemId=1825967-2, Device=1825967-2, HelpURL=https://www.tme.eu/Document/521ec939bc8752ba492c46e2b0122c58/1-1825910-4%20layout.pdf, Manufacturer Part Number=1825967-2, SMD=NOT, Supplier 1=TME, Supplier 2=Farnell, Supplier 3=Digikey, Supplier Part Number 1=1825967-2, Supplier Part Number 2=3406900, Supplier Part Number 3=450-1655-ND
U9: "MPU Arm Dual Cortex-A7 650 MHz, TFBGA-361, BGA12x12, Arm Cortex-M4 real-time coprocessor, 3D GPU, TFTTF, secure boot+crypto", Manufacturer 1 Component Height=1.2mm, Supplier Part Number 1=511-STM32MP157CAC3, Checked by=none, DesignItemId=STM32MP157CAC3, Device=STM32MP157CAC3, HelpURL=https://www.mouser.pl/datasheet/2/389/dm00489391-1799204.pdf, Manufacturer Part Number=STM32MP157CAC3, SMD=Yes, Supplier 1=Mouser
U10: "Memory,DDR3L,4Gb,256Mbx16,1866MT/s,1V35,FBGA96", Manufacturer 1 Component Height=1.4mm, Supplier Part Number 1=340-265846-TRAY, Checked by=none, DesignItemId=MT41K256M16TW-107:P, Device=MT41K256M16TW-107:P, HelpURL=https://www.mouser.pl/datasheet/2/671/4Gb_DDR3L-1283964.pdf, Manufacturer Part Number=MT41K256M16TW-107:P, SMD=Yes, Supplier 1=Mouser
XTAL1: library part "FC-135 32.768KHZ 12.5PF", "32.768 kHz, SMD, 3.2mm x 1.5mm, 12.5 pF, 20 ppm,", Manufacturer 1 Component Height=0.8mm, Manufacturer Part Number="FC-135 32.7680KA-A5", Supplier Part Number 1=SER4103CT-ND, Checked by=none, DesignItemId="FC-135 32.768KHZ 12.5PF", HelpURL=http://www.farnell.com/datasheets/2018173.pdf, SMD=Yes, Supplier 1=Digi-Key, Supplier 2=Farnell, Supplier Part Number 2=1278036, Supplier Part Number 3=n/a
XTAL2: library part "XRCGB32M000F3N00R0 32MHz 6PF", "32 MHz, SMD, 2mm x 1.6mm, 30 ppm, 6 pF", Manufacturer 1 Component Height=0.7mm, Manufacturer Part Number=XRCGB32M000F3N00R0, Supplier Part Number 1=2909962, Checked by=none, DesignItemId="XRCGB32M000F3N00R0 32MHz 6PF", HelpURL=https://pl.mouser.com/datasheet/2/281/p79e-806516.pdf, SMD=Yes, Supplier 1=Farnell, Supplier 2=Mouser, Supplier Part Number 2=81-XRCGB32M000F3N0R0, Supplier Part Number 3=n/a

## Nets (pads, with @x,y where several pads share a name; then routed paths per layer and width w, separated by ;. In a path a pad name is that pad's centre, name@x,y a point inside that pad or via, vN(x,y) a via of type N, cw(c..) or ccw(c..) an arc to the next point about the centre after c; other vN are vias at no path point)
0V675_VTT_DDR: C7.1 C8.1 C9.1 C10.1 C11.1 C12.1 C13.1 C14.1 C15.1 C16.1 C17.1 C18.1 C19.1 C20.1 P10.2 R3.2 R4.2 R5.2 R6.2 R7.2 R8.2 R9.2 R10.2 R11.2 R12.2 R13.2 R14.2 R15.2 R16.2 R17.2 R19.2 R20.2 R22.2 R23.2 R25.2 R26.2 R27.2 R28.2 R29.2
1V35_VDD_DDR: C21.1 C22.1 C23.1 C24.1 C25.1 C26.1 C27.1 C28.1 C29.1 C30.1 C31.1 C32.1 C33.1 C34.1 C54.1 C55.1 C56.1 C57.1 C58.1 C59.1 P10.1 U9.1A8 U9.1B7 U9.1B9 U9.1C8 U9.1D9 U9.1E8 U9.1F9 U9.1G8 U9.1H9 U9.1J8 U10.A1 U10.A8 U10.B2 U10.C1 U10.C9 U10.D2 U10.D9 U10.E9 U10.F1 U10.G7 U10.H2 U10.H9 U10.K2 U10.K8 U10.N1 U10.N9 U10.R1 U10.R9
BOOT0: P5.2 U9.N1
BOOT1: P6.2 U9.N4
BOOT2: P7.2 U9.M2
DDR_A0: R3.1 U9.L20 U10.N3
DDR_A1: R4.1 U9.P22 U10.P7
DDR_A2: R5.1 U9.J20 U10.P3
DDR_A3: R6.1 U9.K22 U10.N2
DDR_A4: R7.1 U9.V20 U10.P8
DDR_A5: R8.1 U9.H20 U10.P2
DDR_A6: R9.1 U9.W20 U10.R8
DDR_A7: R10.1 U9.E20 U10.R2
DDR_A8: R11.1 U9.Y20 U10.T8
DDR_A9: R12.1 U9.G20 U10.R3
DDR_A10: R13.1 U9.R22 U10.L7
DDR_A11: R14.1 U9.R20 U10.R7
DDR_A12: R15.1 U9.P23 U10.N7
DDR_A13: R16.1 U9.F20 U10.T3
DDR_A14: R17.1 U9.R21 U10.T7
DDR_BA0: R19.1 U9.L23 U10.M2
DDR_BA1: R20.1 U9.U20 U10.N8
DDR_BA2: R22.1 U9.M21 U10.M3
DDR_CASN: R25.1 U9.N20 U10.K3
DDR_CKE: R21.2 R27.1 U9.T20 U10.K9
DDR_CLK_N: R18.1 U9.N23 U10.K7
DDR_CLK_P: R18.2 U9.N22 U10.J7
DDR_CSN: R26.1 U9.M22 U10.L2
DDR_DQ0: U9.E22 U10.E3
DDR_DQ1: U9.F22 U10.F7
DDR_DQ2: U9.H21 U10.F2
DDR_DQ3: U9.E21 U10.F8
DDR_DQ4: U9.J21 U10.H3
DDR_DQ5: U9.J22 U10.H8
DDR_DQ6: U9.H22 U10.G2
DDR_DQ7: U9.G21 U10.H7
DDR_DQ8: U9.T21 U10.D7
DDR_DQ9: U9.U21 U10.C3
DDR_DQ10: U9.T22 U10.C8
DDR_DQ11: U9.W21 U10.C2
DDR_DQ12: U9.W23 U10.A7
DDR_DQ13: U9.T23 U10.A2
DDR_DQ14: U9.W22 U10.B8
DDR_DQ15: U9.Y21 U10.A3
DDR_DQM0: U9.H23 U10.E7
DDR_DQM1: U9.V22 U10.D3
DDR_DQS0_N: U9.G23 U10.G3
DDR_DQS0_P: U9.G22 U10.F3
DDR_DQS1_N: U9.U23 U10.B7
DDR_DQS1_P: U9.U22 U10.C7
DDR_ODT: R29.1 U9.L22 U10.K1
DDR_RASN: R23.1 U9.N21 U10.J3
DDR_RESETN: R24.2 U9.D20 U10.T2
DDR_WEN: R28.1 U9.M20 U10.L3
GND: C1.1 C2.2 C3.2 C4.1 C5.2 C6.2 C7.2 C8.2 C9.2 C10.2 C11.2 C12.2 C13.2 C14.2 C15.2 C16.2 C17.2 C18.2 C19.2 C20.2 C21.2 C22.2 C23.2 C24.2 C25.2 C26.2 C27.2 C28.2 C29.2 C30.2 C31.2 C32.2 C33.2 C34.2 C35.2 C36.2 C37.2 C38.2 C39.2 C40.2 C41.2 C42.2 C43.2 C44.2 C45.2 C46.2 C47.2 C48.2 C49.2 C50.2 C51.2 C52.2 C53.2 C54.2 C55.2 C56.2 C57.2 C58.2 C59.2 C60.2 C61.2 C62.2 C63.2 C64.2 C65.2 C66.2 C67.2 C68.2 C69.2 C70.2 C71.2 C72.2 C73.2 C74.2 C75.2 D1.2 D2.2 D3.2 D4.2 D5.2 D6.2 D7.2 D8.2 D9.2 D10.2 D11.2 D12.2 D13.2 D14.2 D15.2 D16.2 D17.2 D18.2 D19.2 D20.2 D21.2 D22.2 D23.2 D24.2 J1.A1_B12 J1.A12_B1 J1.SHELL P1.8 P2.8 P3.7 P3.8 P4.3 P8.3 P8.4 P9.3 P9.4 P10.4 P11.4 R1.1 R2.2 R21.1 R24.1 R30.1 R35.1 R36.1 R37.1 R38.1 R39.1 SW1.3 SW1.4 U9.1A3 U9.1A5 U9.1A7 U9.1B2 U9.1B4 U9.1B6 U9.1B8 U9.1C1 U9.1C3 U9.1C5 U9.1C7 U9.1C9 U9.1D2 U9.1D4 U9.1D6 U9.1D8 U9.1E1 U9.1E3 U9.1E5 U9.1E7 U9.1E9 U9.1F2 U9.1F4 U9.1F6 U9.1F8 U9.1G1 U9.1G3 U9.1G5 U9.1G7 U9.1G9 U9.1H2 U9.1H4 U9.1H6 U9.1H8 U9.1J3 U9.1J5 U9.1J7 U9.A1 U9.A23 U9.AA5 U9.AA8 U9.AA12 U9.AA16 U9.AA21 U9.AB13 U9.AC1 U9.AC23 U9.C7 U9.C12 U9.C16 U9.C21 U9.D4 U9.F21 U9.H3 U9.K21 U9.P3 U9.P21 U9.V21 U9.W3 U10.A9 U10.B1 U10.B3 U10.B9 U10.D1 U10.D8 U10.E1 U10.E2 U10.E8 U10.F9 U10.G1 U10.G8 U10.G9 U10.J2 U10.J8 U10.M1 U10.M9 U10.P1 U10.P9 U10.T1 U10.T9 XTAL2.2 XTAL2.4
MPU_VDD: C48.1 C49.1 C50.1 C51.1 C52.1 C53.1 C60.1 C61.1 C62.1 C66.1 C67.1 C68.1 P4.1 P8.2 R31.2 R32.1 R33.1 R34.1 U9.1F1 U9.1F3 U9.1G2 U9.1G4 U9.1H3 U9.1H5 U9.1J2 U9.1J4 U9.1J6 U9.B18 U9.R3 U9.T3
MPU_VDD_CORE: C38.1 C39.1 C40.1 C41.1 C42.1 C43.1 C44.1 C45.1 C46.1 C47.1 P8.1 U9.1A2 U9.1A4 U9.1A6 U9.1B1 U9.1B3 U9.1B5 U9.1C2 U9.1C4 U9.1C6 U9.1D1 U9.1D3 U9.1D5 U9.1D7 U9.1E2 U9.1E4 U9.1E6 U9.1F5 U9.1F7 U9.1G6 U9.1H7
MPU_VDD_USB: C73.1 C74.1 C75.1 P9.2 U9.AA15 U9.AA17
MPU_VDDA: C63.1 C64.1 C65.1 P9.1 U9.1H1 U9.R4
NetC6_1: C6.1 U9.M4
NetC69_1: C69.1 U9.AB15
NetC70_1: C70.1 C71.1 U9.AB14 U9.C14
NetC72_1: C72.1 U9.C17 U9.C18
NetJ1_A5: J1.A5 R38.2
NetJ1_B5: J1.B5 R39.2
NetP5_1: P5.1 R32.2
NetP5_3: P5.3 R35.2
NetP6_1: P6.1 R33.2
NetP6_3: P6.3 R36.2
NetP7_1: P7.1 R34.2
NetP7_3: P7.3 R37.2
NetR1_2: R1.2 U9.AB18
NetR2_1: R2.1 U9.K23
NetR30_2: R30.2 U10.L8
NRST: C37.1 D21.1 P4.5 R31.1 SW1.1 SW1.2 U9.M3
OSC32_IN: C1.2 U9.L2 XTAL1.2
OSC32_OUT: C2.1 U9.L1 XTAL1.1
OSC_IN: C4.2 U9.P1 XTAL2.1
OSC_OUT: C5.1 U9.P2 XTAL2.3
PA0_WKUP: D24.1 P11.3 U9.AB3
PA1: D2.1 P1.1 U9.AA4
PA2: D1.1 P1.2 U9.AC3
PA3: D4.1 P1.3 U9.U2
PA4: D3.1 P1.4 U9.V4
PA5: D6.1 P1.5 U9.V3
PA6: D5.1 P1.6 U9.AC8
PA7: D8.1 P1.7 U9.AB8
PA8: D7.1 P2.1 U9.A13
PA9: D10.1 P2.2 U9.A8
PA10: D9.1 P2.3 U9.Y17
PA11: D12.1 P2.4 U9.AA18
PA12: D11.1 P2.5 U9.AB19
PA13: D14.1 P2.6 U9.N2
PA14: D13.1 P2.7 U9.T2
PA15: D16.1 P3.1 U9.C19
PB0: D15.1 P3.2 U9.AB6
PB1: D18.1 P3.3 U9.AA7
PB2: D17.1 P3.4 U9.Y16
PB3: D20.1 P3.5 U9.A11
PB4: D19.1 P3.6 U9.B13
PMIC_WAKEUP: D22.1 P11.1 U9.K2
PWR_ON: D23.1 P11.2 U9.R2
SWCLK: P4.2 U9.B20
SWDIO: P4.4 U9.C20
SWO: P4.6 U9.A19
USB1_N: J1.A7 J1.B7 U9.AB17
USB1_P: J1.A6 J1.B6 U9.AC17
VREF_DDR: C3.1 C35.1 C36.1 P10.3 U9.AC20 U10.H1 U10.M8
pads on no net: J1.A4_B9 J1.A8 J1.A9_B4 J1.B8 U9.A2 U9.A3 U9.A4 U9.A5 U9.A7 U9.A10 U9.A14 U9.A16 U9.A17 U9.A20 U9.A21 U9.A22 U9.AA1 U9.AA2 U9.AA3 U9.AA6 U9.AA9 U9.AA10 U9.AA11 U9.AA13 U9.AA14 U9.AA19 U9.AA20 U9.AA22 U9.AA23 U9.AB1 U9.AB2 U9.AB4 U9.AB5 U9.AB7 U9.AB9 U9.AB10 U9.AB11 U9.AB12 U9.AB16 U9.AB20 U9.AB21 U9.AB22 U9.AB23 U9.AC2 U9.AC4 U9.AC5 U9.AC7 U9.AC10 U9.AC11 U9.AC13 U9.AC14 U9.AC16 U9.AC19 U9.AC21 U9.AC22 U9.B1 U9.B2 U9.B3 U9.B4 U9.B5 U9.B6 U9.B7 U9.B8 U9.B9 U9.B10 U9.B11 U9.B12 U9.B14 U9.B15 U9.B16 U9.B17 U9.B19 U9.B21 U9.B22 U9.B23 U9.C1 U9.C2 U9.C3 U9.C4 U9.C5 U9.C6 U9.C8 U9.C9 U9.C10 U9.C11 U9.C13 U9.C15 U9.C22 U9.C23 U9.D1 U9.D2 U9.D3 U9.D5 U9.D6 U9.D7 U9.D8 U9.D9 U9.D10 U9.D11 U9.D12 U9.D13 U9.D14 U9.D15 U9.D16 U9.D17 U9.D18 U9.D19 U9.D21 U9.D22 U9.D23 U9.E1 U9.E2 U9.E3 U9.E4 U9.E23 U9.F2 U9.F3 U9.F4 U9.G1 U9.G2 U9.G3 U9.G4 U9.H1 U9.H2 U9.H4 U9.J2 U9.J3 U9.J4 U9.K1 U9.K3 U9.K4 U9.K20 U9.L3 U9.L4 U9.L21 U9.N3 U9.P4 U9.P20 U9.T1 U9.T4 U9.U1 U9.U3 U9.U4 U9.V2 U9.W1 U9.W2 U9.W4 U9.Y1 U9.Y2 U9.Y3 U9.Y4 U9.Y5 U9.Y6 U9.Y7 U9.Y8 U9.Y9 U9.Y10 U9.Y11 U9.Y12 U9.Y13 U9.Y14 U9.Y15 U9.Y18 U9.Y19 U9.Y22 U9.Y23 U10.J1 U10.J9 U10.L1 U10.L9 U10.M7

## Silkscreen, mask and mechanical layers (free items; w line width, h text height)
PCB Outline:
  the board outline again, w0.2